# EAGLE board timer555 (EAGLE 7.2.0)
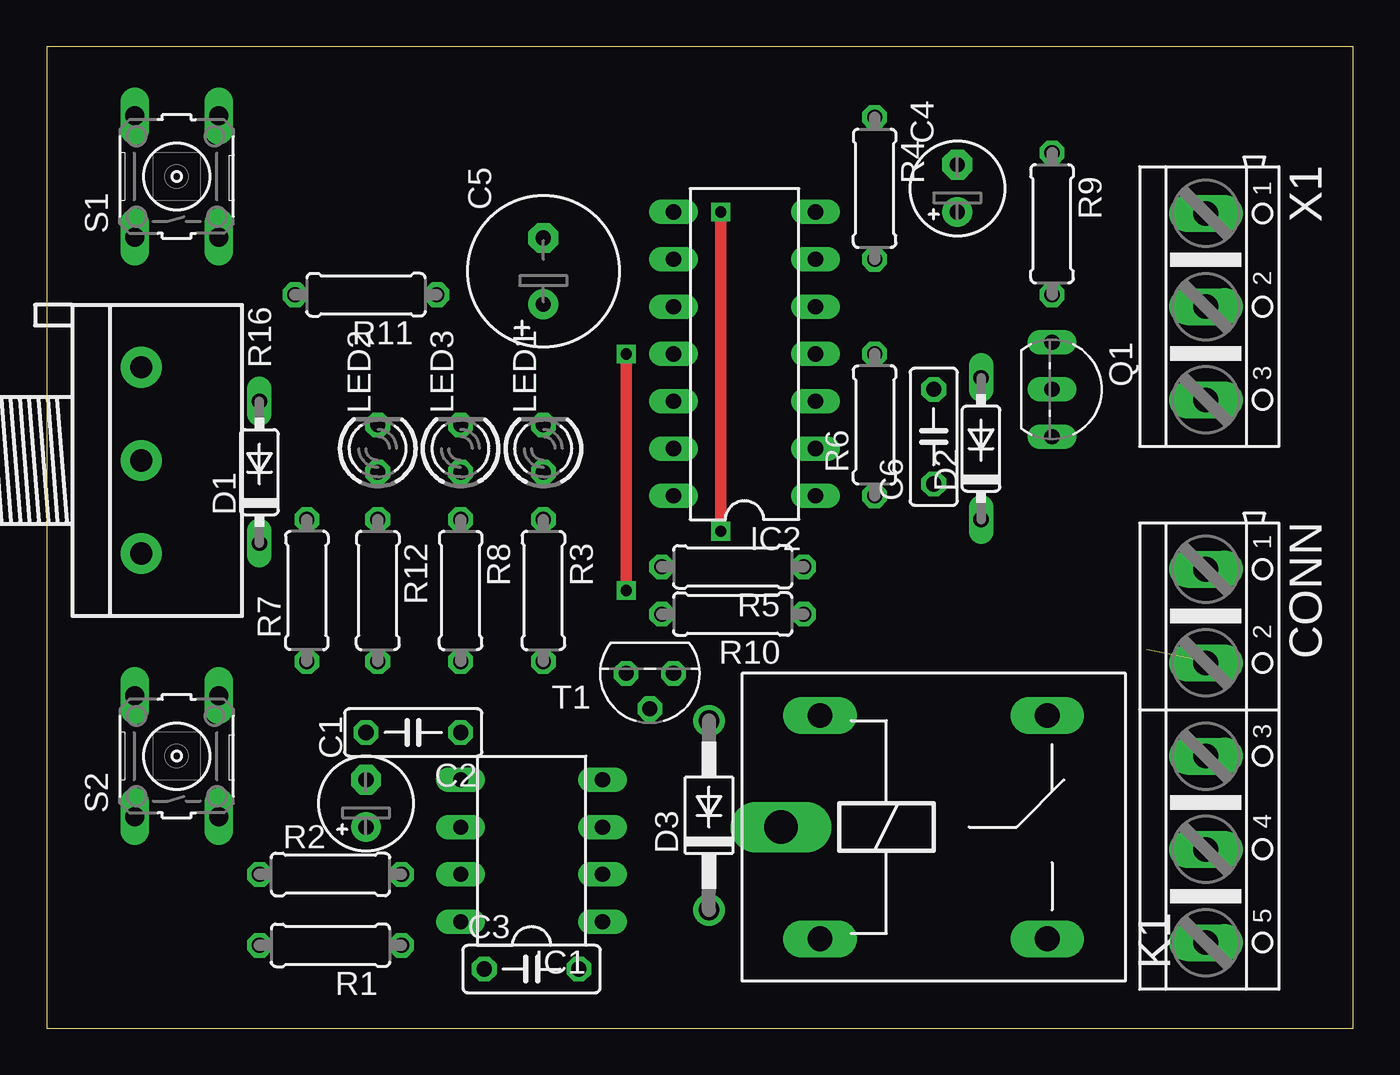
[diagram p0: board, top side]
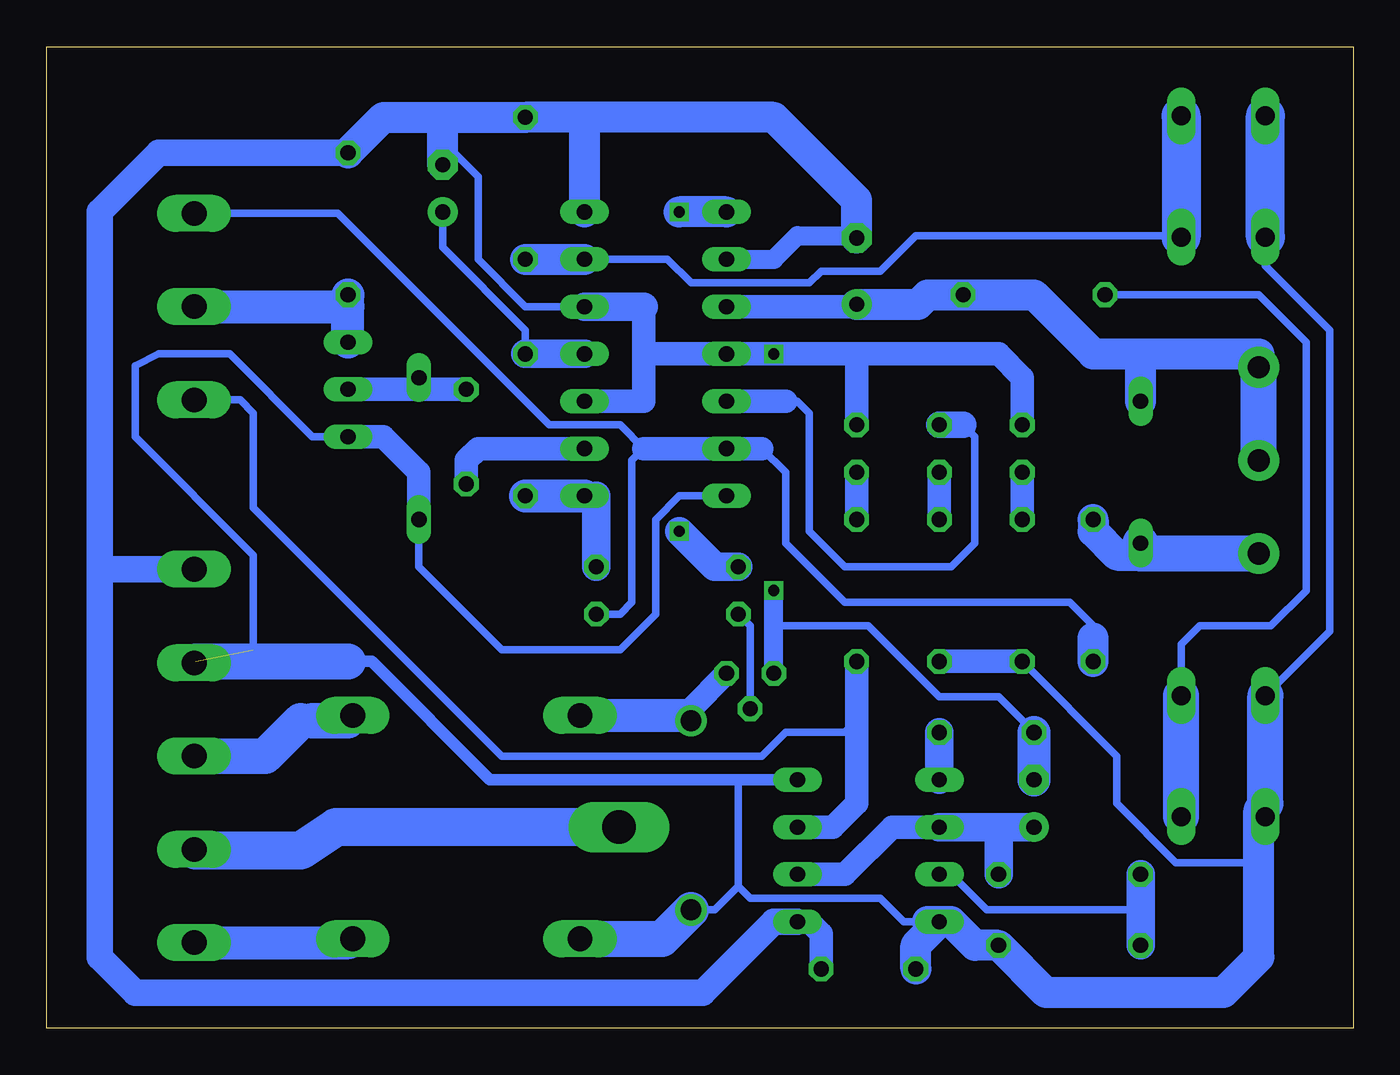
[diagram p1: board, bottom side, seen from below]

Size 70.16 x 52.7 mm. Coordinates in mm from the lower left corner, seen from the top.
Outline: 0,0 70.16,0 70.16,52.7 0,52.7 0,0
Copper layers (1*16): Top 0.035mm / dielectric 1.5mm / Bottom 0.035mm
Design rules "default": minimum track width 10mil, minimum drill 24mil, track to track 8mil, track to pad 8mil, pad to pad 8mil, via to via 8mil, smd to smd 8mil, copper to edge 40mil, drill to drill 8mil, minimum pad ring 10mil, minimum via ring 8mil, stop-mask expansion 4mil, vias tented up to drill 0mil, thermal gap 10mil

## Footprints (pad centres in the part's own frame; a part is rotated, then mirrored left to right if it is on the bottom)
E2,5-5 = drill 0.813 pad 1.6: + -1.27,0 | drill 0.813 pad 1.6 octagon: - 1.27,0
C050-025X075 = drill 0.813 octagon: 1 -2.54,0; 2 2.54,0
E3,5-8 = drill 0.813 pad 1.6: + -1.778,0 | drill 0.813 pad 1.6 octagon: - 1.778,0
AK500/5 = drill 1.321 long: 1 -10.033,0; 2 -5.004,0; 3 0,0; 4 5.004,0; 5 10.008,0
DO35-7 = drill 0.813 long: A 3.81,0; C -3.81,0
DO41-10 = drill 1.118: A 5.08,0; C -5.08,0
DIL-08 = drill 0.813 long: 1 -3.81,-3.81; 2 -1.27,-3.81; 3 1.27,-3.81; 4 3.81,-3.81; 5 3.81,3.81; 6 1.27,3.81; 7 -1.27,3.81; 8 -3.81,3.81
DIL14 = drill 0.813 long: 1 -7.62,-3.81; 2 -5.08,-3.81; 3 -2.54,-3.81; 4 0,-3.81; 5 2.54,-3.81; 6 5.08,-3.81; 7 7.62,-3.81; 8 7.62,3.81; 9 5.08,3.81; 10 2.54,3.81; 11 0,3.81; 12 -2.54,3.81; 13 -5.08,3.81; 14 -7.62,3.81
ZF112 = drill 1.321 long: 1 -6.096,5.994; 2 -6.096,-5.994; O 6.096,5.994; S 6.096,-5.994 | drill 1.803 long: P -8.204,0
LED3MM = drill 0.813 octagon: A -1.27,0; K 1.27,0
TO92-EBC = drill 0.813 long: B 0,-1.27; C -2.54,-1.27; E 2.54,-1.27
0207/7 = drill 0.813 octagon: 1 -3.81,0; 2 3.81,0
3RP/1610N = drill 1.2 pad 2.184: 1 -5,0; 2 0,0; 3 5,0
B3F-10XX = drill 1.016 long: 1 -3.251,2.261; 2 3.251,2.261; 3 -3.251,-2.261; 4 3.251,-2.261
TO92 = drill 0.813 octagon: 1 1.27,0; 2 0,1.905; 3 -1.27,0
AK500/3 = drill 1.321 long: 1 -5.004,0; 2 0,0; 3 5.004,0

## Placement (x,y rotation side)
C1  10uF  [E2,5-5]  17.15,12.06 90 top
C2  10nF  [C050-025X075]  19.69,15.88 180 top
C3  100nF  [C050-025X075]  26.04,3.17 0 top
C4  10uF  [E2,5-5]  48.9,45.09 90 top
C5  220uF  [E3,5-8]  26.67,40.64 90 top
C6  10nF  [C050-025X075]  47.62,31.75 90 top
CONN  [AK500/5]  62.23,14.61 270 top
D1  1N4148DO35-7  [DO35-7]  11.43,29.84 90 top
D2  1N4148DO35-7  [DO35-7]  50.16,31.11 90 top
D3  1N4004  [DO41-10]  35.56,11.43 90 top
IC1  NE555  [DIL-08]  26.04,9.53 90 top
IC2  4013N  [DIL14]  37.47,36.2 90 top
K1  ZF112  [ZF112]  47.62,10.79 0 top
LED1  AZUL  [LED3MM]  26.67,31.11 90 top
LED2  ROJO  [LED3MM]  17.78,31.11 90 top
LED3  VERDE  [LED3MM]  22.23,31.11 90 top
Q1  BC557  [TO92-EBC]  55.24,34.29 270 top
R1  100K  [0207/7]  15.24,4.45 180 top
R2  22K  [0207/7]  15.24,8.26 0 top
R3  330  [0207/7]  26.67,23.5 270 top
R4  10K  [0207/7]  44.45,45.09 270 top
R5  2K2  [0207/7]  36.83,24.77 180 top
R6  100K  [0207/7]  44.45,32.38 90 top
R7  47K  [0207/7]  13.97,23.5 90 top
R8  330  [0207/7]  22.23,23.5 270 top
R9  2K2  [0207/7]  53.98,43.18 270 top
R10  4K7  [0207/7]  36.83,22.23 180 top
R11  2K2  [0207/7]  17.15,39.37 180 top
R12  330  [0207/7]  17.78,23.5 270 top
R16  1000K  [3RP/1610N]  5.08,30.48 270 top
S1  [B3F-10XX]  6.99,45.72 90 top
S2  [B3F-10XX]  6.99,14.61 90 top
T1  BC337  [TO92]  32.38,19.05 180 top
X1  [AK500/3]  62.23,38.73 270 top

## Library data of the parts
C1-C6 R1-R12 = rcl
CONN X1 = con-ptr500; OC_FARNELL: unknown; OC_NEWARK: unknown
D1-D3 = diode
IC1 = st-microelectronics; MF: Arrow Electronics; MPN: NE555N; OC_FARNELL: 1467742; OC_NEWARK: 89K1486
IC2 = 40xx
K1 = relay; OC_FARNELL: unknown; OC_NEWARK: unknown
LED1-LED3 = led
Q1 = transistor-pnp
R16 = pot
S1 S2 = switch-omron; MPN: B3F-1000; OC_FARNELL: 176432; OC_NEWARK: 36M3542
T1 = transistor

## Nets
COMUN: CONN.4 K1.P
GND: C1.- C2.2 C3.2 C4.- C5.- CONN.1 IC1.1 IC2.3 IC2.5 IC2.7 IC2.9 IC2.11 LED1.K LED2.K R4.1 R9.1 T1.1
HABILITA: IC2.13 R7.1 R10.1 X1.1
LEDTIME: IC2.12 LED3.K
N$1: D3.A K1.1 T1.3
N$6: IC2.1 R5.1 R6.1
N$7: C1.+ IC1.2 IC1.6 R2.2
N$8: C4.+ IC2.4 R6.2
N$9: IC1.7 R1.2 R2.1
N$10: C2.1 IC1.5
N$11: D1.C R7.2 R16.3
N$12: LED3.A R8.1
N$13: LED1.A R3.1
N$14: IC2.6 R4.2 S1.3 S1.4
N$15: C5.+ D1.A IC2.10 R11.1 R16.1 R16.2
N$16: R11.2 S2.3 S2.4
N$17: LED2.A R12.1
N$18: R10.2 T1.2
N$19: C6.1 IC2.2
N$20: C6.2 D2.A Q1.B
NA: CONN.5 K1.S
NC: CONN.3
RELOJ: IC1.3 R3.2 X1.3
RESET: Q1.C R9.2 X1.2
S$3: K1.O
SET2: IC2.8 R5.2
VCC: C3.1 CONN.2 D2.C D3.C IC1.4 IC1.8 IC2.14 K1.2 Q1.E R1.1 R8.2 R12.2 S1.1 S1.2 S2.1 S2.2

## Tracks (layer width: path | path; a pad name or v marks a point on that pad's centre or on a via)
COMUN
  Bottom 0.406: 62.15,9.53 CONN.4
  Bottom 2.032: K1.P 54.61,10.79 56.52,9.53 62.15,9.53
GND  (via drill 0.6)
  Top 0.61: v31.12,23.5 v31.12,36.2
  Bottom 0.406: C2.2 19.05,17.78 22.23,17.78 26.04,21.59 31.12,21.59 | IC2.5 44.45,38.73 46.99,41.27 46.99,45.72 48.9,47.62
  Bottom 1.016: IC2.9 31.12,41.27 29.84,42.55 26.8,42.55 C5.- | T1.1 31.12,21.59 v31.12,23.5
  Bottom 1.27: 38.1,36.2 IC2.11 v31.12,36.2 26.67,36.2 | 38.1,36.2 38.1,38.73 | IC2.3 38.1,33.66 38.1,36.2 | 26.67,36.2 19.05,36.2 17.78,34.92 LED2.K | LED1.K 26.67,36.2 | C3.2 28.58,5.08 29.21,5.71 IC1.1
  Bottom 1.422: CONN.1 67.18,24.64 67.31,24.77 | 67.31,24.77 67.31,43.81 64.13,46.99 R9.1 | IC1.1 31.12,5.71 34.93,1.91 65.41,1.91 67.31,3.81 67.31,24.77
  Bottom 1.524: 38.1,38.73 IC2.5
  Bottom 1.676: C5.- 26.67,44.45 31.12,48.9 41.27,48.9 | 41.27,48.9 R4.1 48.9,48.9 | R9.1 52.07,48.9 48.9,48.9 | C4.- 48.9,47.62 48.9,48.9 | IC2.7 41.27,48.9
  Bottom 1.778: C1.- C2.2
HABILITA
  Bottom 0.406: R10.1 39.37,22.23 38.73,22.86 38.73,30.48 38.1,31.11 39.37,32.38 43.18,32.38 54.53,43.74 X1.1 | 13.97,20.95 13.97,21.59 15.24,22.86 27.3,22.86 30.48,26.04 30.48,29.84 31.75,31.11
  Bottom 1.27: 38.1,31.11 IC2.13 31.75,31.11
  Bottom 1.676: R7.1 13.97,20.95
LEDTIME
  Bottom 0.406: 30.48,33.66 29.84,33.66 29.21,33.02 29.21,26.67 27.3,24.77 21.59,24.77 20.32,26.04 20.32,31.75 20.95,32.38
  Bottom 1.27: IC2.12 30.48,33.66
  Bottom 1.422: 20.95,32.38 LED3.K
N$1
  Bottom 0.406: 35.92,16.79 D3.A
  Bottom 1.27: T1.3 35.56,17.14 D3.A
  Bottom 1.778: K1.1 35.92,16.79
N$6
  Bottom 0.406: 40.64,28.57 IC2.1
  Bottom 1.524: R5.1 40.64,28.57
  Bottom 1.778: R6.1 IC2.1
N$7
  Bottom 1.27: IC1.2 27.3,8.26 24.77,10.79 IC1.6
  Bottom 1.524: R2.2 19.05,10.79 | 19.05,10.79 IC1.6 | C1.+ 19.05,10.79
N$8
  Bottom 0.406: R6.2 44.45,37.47 48.9,41.91 C4.+
  Bottom 1.524: R6.2 IC2.4
N$9
  Bottom 0.406: IC1.7 21.59,8.26 19.69,6.35 11.43,6.35
  Bottom 1.524: R2.1 11.43,6.35 R1.2
N$10
  Bottom 1.524: IC1.5 C2.1
N$11
  Bottom 1.676: R7.2 13.97,26.67 12.7,25.4 10.87,25.4 10.79,25.48
  Bottom 1.93: R16.3 10.79,25.48 11.43,25.48 D1.C
N$12
  Bottom 1.27: LED3.A R8.1
N$13
  Bottom 1.27: R3.1 LED1.A
N$14
  Bottom 0.406: 42.55,41.27 IC2.6 36.83,41.27 35.56,40.01 29.21,40.01 28.58,40.64 25.4,40.64 23.5,42.55 9.32,42.55 S1.3
  Bottom 1.676: R4.2 IC2.6
  Bottom 2.083: S1.4 S1.3
N$15
  Bottom 1.27: IC2.10 26.8,38.73 C5.+
  Bottom 1.676: C5.+ 23.37,38.86 22.86,39.37 R11.1 17.15,39.37 13.97,36.2 11.43,36.2 | 11.43,36.2 5.08,36.2 R16.1 | D1.A 11.43,36.2
  Bottom 1.93: R16.2 R16.1
N$16
  Bottom 0.406: S2.4 9.25,20.6 8.26,21.59 4.45,21.59 2.54,23.5 2.54,36.83 5.08,39.37 R11.2
  Bottom 1.93: S2.3 S2.4
N$17
  Bottom 1.27: R12.1 LED2.A
N$18
  Bottom 0.406: T1.2 32.38,21.59 R10.2
N$19
  Bottom 1.27: IC2.2 46.99,31.11 47.62,30.48 C6.1
N$20
  Bottom 1.27: Q1.B 50.16,34.29 | 50.16,34.29 C6.2 | 50.16,35.56 D2.A 50.16,34.29
NA
  Bottom 0.406: 53.92,4.6 K1.S
  Bottom 1.778: CONN.5 53.92,4.6
NC
  Bottom 1.905: CONN.3 58.42,14.61 56.52,16.51
RELOJ
  Bottom 0.406: X1.3 59.77,33.73 59.05,33.02 59.05,27.94 45.72,14.61 31.75,14.61 30.48,15.88 27.3,15.88 26.67,16.51
  Bottom 1.27: IC1.3 27.94,10.79 26.67,12.06 26.67,16.51 R3.2
RESET
  Bottom 0.406: 53.98,38.73 R9.2
  Bottom 1.778: X1.2 53.98,38.73 | Q1.C R9.2
S$3
  Bottom 0.406: 55.91,16.51 K1.O
  Bottom 1.905: 53.98,16.51 55.91,16.51
SET2  (via drill 0.6)
  Top 0.61: v36.2,26.67 v36.2,43.81
  Bottom 1.524: R5.2 34.29,24.77 v36.2,26.67
  Bottom 1.676: IC2.8 v36.2,43.81
VCC  (1 unrouted)
  Bottom 0.406: 4.72,12.06 S2.1 5.08,11 4.45,10.16 5.71,8.89 9.53,8.89 12.7,12.06 12.7,14.61 R12.2 | S1.1 4.72,40.92 1.27,37.47 1.27,21.31 S2.2 | Q1.E 55.88,31.75 60.32,36.2 64.13,36.2 65.41,35.56 65.41,31.75 59.05,25.4 59.05,20.32 | 62.15,19.68 CONN.2 | D3.C 34.29,6.35 33.02,7.62 | IC1.4 33.02,13.34 33.02,7.62 | 33.02,7.62 32.38,6.99 25.4,6.99 24.13,5.71 22.86,5.71 IC1.8 | IC2.14 36.2,28.57 37.47,27.3 37.47,22.23 39.37,20.32 45.72,20.32 50.16,24.77 D2.C
  Bottom 0.61: 53.98,19.68 52.7,19.68 46.36,13.34 IC1.4
  Bottom 1.27: 5.08,11.71 4.72,12.06 | R8.2 R12.2 | D2.C 50.16,29.84 52.07,31.75 Q1.E
  Bottom 1.676: 5.08,11.71 5.08,3.81 6.99,1.91 16.51,1.91 R1.1 20.32,4.45 21.59,5.71 22.86,5.71 | C3.1 23.5,4.45 IC1.8
  Bottom 1.93: 4.72,12.06 S2.2 | K1.2 37.11,4.8 D3.C | 62.15,19.68 53.98,19.68
  Bottom 2.083: S1.1 S1.2